# Altium PCB SFarm.PcbDoc (part 2 of 2)
Units mil, origin at the board's own origin, x right, y up, seen from the top; angles counter-clockwise.
Board outline 5511.81 x 3149.61 mil, 2 copper layers (Top Layer, Bottom Layer), stack 61.855 mil thick; 89 components, 71 nets, 378 pads, 334 vias.
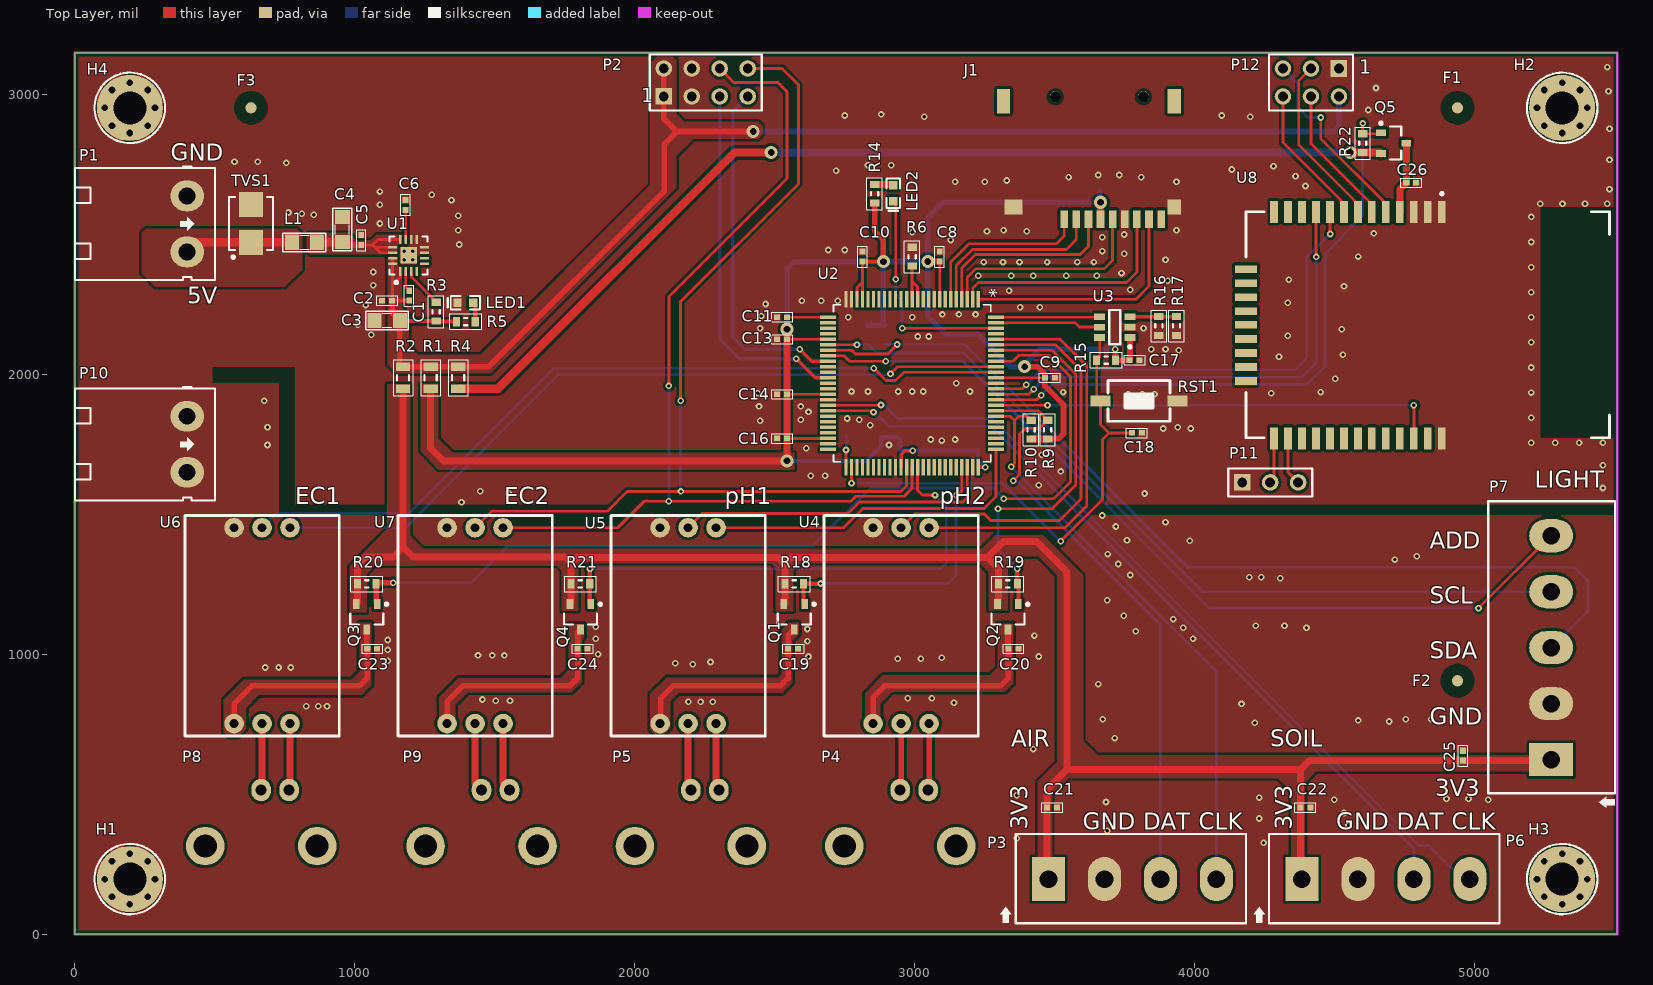
[diagram p0: Top Layer view]

## Via types
v1: diameter 23.62, hole 11.81, Top Layer to Bottom Layer, tented both sides, 293 vias
v2: diameter 47.24, hole 23.62, Top Layer to Bottom Layer, tented both sides, 41 vias

## Nets (pads, with @x,y where several pads share a name; then routed paths per layer and width w, separated by ;. In a path a pad name is that pad's centre, name@x,y a point inside that pad or via, vN(x,y) a via of type N, cw(c..) or ccw(c..) an arc to the next point about the centre after c; other vN are vias at no path point) (continued)
SD_CLK: (continued)
  Top Layer w10: U2.3 3188.98,2345.98 3221,2378 3679,2378 3708.66,2407.66 J1.5
SDA_LIGHT: P7.3 R8.1 U2.32 | length 3424
  Top Layer w10: U2.32 2776.39,2086.61 2790,2073 2905,2073 v1(2939,2107)
  Bottom Layer w10: R8.1 2937.73,2108.27 v1(2939,2107) ; v1@2939,2108.27 3179.73,2108.27 3977,1311 5358,1311 5407,1262 5407,1155.03 P7.3
SWD_CLK: P2.7 U2.34 | length 1258.4
  Top Layer w12: v1(2591,2090) 2633.76,2047.24 U2.34
  Bottom Layer w12: P2.7 2351,2939.58 2351,2134 2395,2090 v1(2591,2090)
SWD_DIO: P2.5 U2.37 | length 1310.8
  Top Layer w12: v1(2578,2056) 2645.81,1988.19 U2.37
  Bottom Layer w12: P2.5 2304.72,2127.28 2376,2056 v1(2578,2056)
TCK: P12.4 U8.6 | length 502.4
  Top Layer w10: P12.4 4417.32,2824.68 4635.04,2606.96 U8.6
TDI: P12.6 U8.8 | length 502.4
  Top Layer w10: P12.6 4317.32,2828.68 4535.04,2610.96 U8.8
TDO: P12.3 U8.7 | length 617.6
  Top Layer w10: P12.3 4374,3049.98 4374,2820 4585.04,2608.96 U8.7
TMS: P12.5 U8.5 | length 690.9
  Top Layer w10: v1(4452,2918) 4452,2843 4685.04,2609.96 U8.5
  Bottom Layer w10: P12.5 4370,3040.63 4370,2955 4407,2918 v1(4452,2918)
TX_DBG_ZB: P11.3 U8.24 | length 172.6
  Top Layer w10: U8.24 4335.04,1650.79 P11.3
TX_EC: U2.90 U6.5 | length 2889.6
  Top Layer w10: v1(2855,2022) 2899,1978 2933,1978 2962.87,2007.87 U2.90
  Bottom Layer w10: U6.5 720.96,1504.04 1195.04,1504.04 1713,2022 v1(2855,2022)
TX_EC2: P2.8 U2.62 U7.5 | length 3503.5
  Top Layer w10: U7.5 1489.08,1511 1903,1511 1974,1582 v1(2166,1582) 2952.44,1582 2972.44,1602 U2.62 ; v1(2165,1906) 2165,2260 2586,2681 2586,3035 2527.69,3093.31 P2.8
  Bottom Layer w10: v1(2165,1906) 2165,1583 v1(2166,1582)
TX_PH: U2.73 U5.5 | length 1150.3
  Top Layer w10: U5.5 2242.24,1503 2763,1503 2804,1544 3173,1544 3188.98,1559.98 U2.73
TX_PH2: U2.95 U4.5 | length 1506.3
  Top Layer w10: U4.5 3001.39,1501 3250,1501 3273,1478 3519,1478 3596,1555 3596,2015 3504.7,2106.3 U2.95
WAKE: U2.99 U3.5 | length 376.6
  Top Layer w10: U2.99 3573.96,2185.04 3589.71,2169.29 U3.5
pads on no net: F1. F2. F3. F4. F5. F6. H2. H3. J1.0 J1.12 J1.13 P4.3 P5.3 P8.3 P9.3 U1.4 U1.5 U1.6 U2.7 U2.10 U2.11 U2.14 U2.15 U2.16 U2.17 U2.18 U2.19 U2.20 U2.21 U2.27 U2.28 U2.29 U2.35 U2.36 U2.38 U2.39 U2.44 U2.45 U2.46 U2.47 U2.50 U2.53 U2.54 U2.55 U2.56 U2.57 U2.58 U2.59 U2.65 U2.66 U2.67 U2.68 U2.69 U2.70 U2.71 U2.77 U2.78 U2.79 U2.80 U2.81 U2.93 U2.97 U8.11 U8.12 U8.13 U8.14 U8.15 U8.16 U8.17 U8.18 U8.19 U8.20 U8.21 U8.22 U8.25 U8.26 U8.27 U8.28 U8.29 U8.30 U8.31 U8.32 U8.34
copper on no net:
  other v2: 196.85,106.85 5314.96,106.85 133.21,133.21 260.49,133.21 5251.32,133.21 5378.6,133.21 106.85,196.85 286.85,196.85 5224.96,196.85 5404.96,196.85 133.21,260.49 260.49,260.49 5251.32,260.49 5378.6,260.49 196.85,286.85 5314.96,286.85 196.85,2862.76 5314.96,2862.76 133.21,2889.12 260.49,2889.12 5251.32,2889.12 5378.6,2889.12 106.85,2952.76 286.85,2952.76 5224.96,2952.76 5404.96,2952.76 133.21,3016.4 260.49,3016.4 5251.32,3016.4 5378.6,3016.4 196.85,3042.76 5314.96,3042.76

## Polygon pours and split planes (outlines as drawn)
P5V0 on Top Layer "P5V0_L01_P000" (solid, remove dead copper, pour order 0): 793,2521 813,2501 813,2375 751,2313 288,2313 239,2362 239,2506 254,2521
NetC4_2 on Top Layer "NETC4_2_L01_P002" (solid, remove dead copper, pour order 2): 842,2429 829,2442 829,2497 838,2506 979,2506 1006,2479 1058,2479 1079,2500 1168,2500 1171,2497 1171,2469 1168,2466 1156,2466 1152,2462 1152,2431 1150,2429
P3V3 on Top Layer "P3V3_L01_P004" (solid, remove dead copper, pour order 4): 1118,2422 1118,2035 1149,2004 1487,2004 2150,2667 2150,2781 2211,2842 2442,2842 2458,2858 2458,2887 2442,2903 2178,2903 2149,2932 2149,3123 2135,3137 2082,3137 2057,3112 2057,2678 1450,2071 1225,2071 1194,2102 1194,2213 1169,2238 1169,2382 1152,2399 1152,2422
P3V3_SS on Top Layer "P3V3_SS_L01_P006" (solid, remove dead copper, pour order 6): 1116,1965 1116,1448 982,1314 982,1150 1043,1150 1043,1288 1072,1317 1723,1317 1741,1299 1741,1156 1799,1156 1799,1310 1815,1326 2489,1326 2505,1310 2505,1154 2568,1154 2568,1301 2593,1326 3233,1326 3266,1293 3266,1157 3333,1157 3333,1325 3358,1350 3443,1350 3511,1282 3511,616 3441,546 3441,270 3491,270 3492,271 3492,499 3551,558 4299,558 4346,511 4346,267 4391,267 4395,271 4395,541 4436,582 5314,582 5314,638 5315,639 3655,639 3603,691 3603,1283 3461,1425 3289,1425 3241,1377 1245,1377 1199,1423 1199,1965
NetC23_2 on Top Layer "NETC23_2_L01_P008" (solid, remove dead copper, pour order 8): 585,707 611,733 611,808 658,855 1026,855 1060,889 1060,1113 1018,1113 1018,938 989,909 604,909 533,838 533,722 548,707
NetC24_2 on Top Layer "NETC24_2_L01_P010" (solid, remove dead copper, pour order 10): 1819,1108 1819,1059 1811,1051 1811,1049 1811,901 1775,865 1405,865 1359,819 1359,738 1344,723 1318,723 1303,738 1303,847 1371,915 1736,915 1765,944 1765,1108
NetC19_2 on Top Layer "NETC19_2_L01_P012" (solid, remove dead copper, pour order 12): 2106,715 2128,737 2128,833 2158,863 2529,863 2564,898 2563,899 2563,1048 2587,1072 2587,1113 2552,1113 2526,1087 2526,930 2513,917 2115,917 2057,859 2057,731 2073,715
NetC20_2 on Top Layer "NETC20_2_L01_P014" (solid, remove dead copper, pour order 14): 3353,1110 3353,896 3324,867 2921,867 2878,824 2878,749 2863,734 2843,734 2824,753 2824,861 2888,925 3270,925 3299,954 3299,1110
P3V3_MCU on Top Layer "P3V3_MCU_L01_P016" (solid, remove dead copper, pour order 16): 1236,1966 1236,1725 1301,1660 2571,1660 2571,1720 1350,1720 1299,1771 1299,1966
GND on Top Layer "GND_L01_P018" (solid, remove dead copper, pour order 18): 0,1968.5 728.35,1968.5 728.35,1496.06 5511.81,1496.06 5511.81,0 0,0
GND on Top Layer "GND_L01_P020" (solid, remove dead copper, pour order 20): 0,3149.61 5511.81,3149.61 5511.81,1535.43 787.4,1535.43 787.4,2027.56 0,2027.56
GND on Top Layer "GND_L01_P022" (solid, remove dead copper, pour order 22): 0,2145.67 0,1830.71 492.13,1830.71 492.13,2145.67
GND on Bottom Layer "GND_L02_P024" (solid, remove dead copper, pour order 24): 0,1968.5 728.35,1968.5 728.35,1496.06 5511.81,1496.06 5511.81,0 0,0
GND on Bottom Layer "GND_L02_P026" (solid, remove dead copper, pour order 26): 0,3149.61 5511.81,3149.61 5511.81,1535.43 787.4,1535.43 787.4,2027.56 0,2027.56

## Keep-outs
Keep-Out Layer:
  the board outline again, w8

## Other copper
Top Layer:
  pour cut-out: 5511.81,1771.65 5511.81,2578.74
  pour cut-out: 5511.81,1771.65 5511.81,2598.43 5236.22,2598.43 5236.22,1771.65
Bottom Layer:
  pour cut-out: 5511.81,1771.65 5511.81,2598.43 5236.22,2598.43 5236.22,1771.65

## Silkscreen, mask and mechanical layers (free items; w line width, h text height)
Top Overlay:
  text "GND" at 342.52,2763.78 h60
  text "5V" at 402.5,2251.97 h60
  text "LIGHT" at 5216.54,1594.49 h60
  text "EC1" at 787.4,1535.43 h60
  text "EC2" at 1535.43,1535.43 h60
  text "pH1" at 2322.83,1535.43 h60
  text "pH2" at 3090.55,1535.43 h60
  text "ADD" at 4842.52,1377.95 h60
  text "SCL" at 4842.52,1181.1 h60
  text "SDA" at 4842.52,984.25 h60
  text "GND" at 4842.52,748.03 h60
  text "AIR" at 3346.46,669.29 h60
  text "SOIL" at 4271.65,669.29 h60
  text "3V3" at 4862.2,492.13 h60
  text "3V3" at 3405.51,374.02 h60 r90
  text "GND" at 3602.36,374.02 h60
  text "DAT" at 3818.9,374.02 h60
  text "CLK" at 4015.75,374.02 h60
  text "3V3" at 4350.39,374.02 h60 r90
  text "GND" at 4507.87,374.02 h60
  text "DAT" at 4724.41,374.02 h60
  text "CLK" at 4921.26,374.02 h60

## Text inside footprints (layer, text, board x,y; h text height)
P2: Top Overlay "1" at 2024.72,2973.31 h50
P12: Top Overlay "1" at 4590.55,3074.8 h50
U2: Top Overlay "*" at 3247.13,2308.5 h50 r270